# Altium PCB 电机参数系统测试.PcbDoc (part 1 of 2)
Units mil, origin at the board's own origin, x right, y up, seen from the top; angles counter-clockwise.
Board outline 5118.11 x 3258.06 mil, 2 copper layers (Top Layer, Bottom Layer); 172 components, 153 nets, 639 pads, 287 vias.
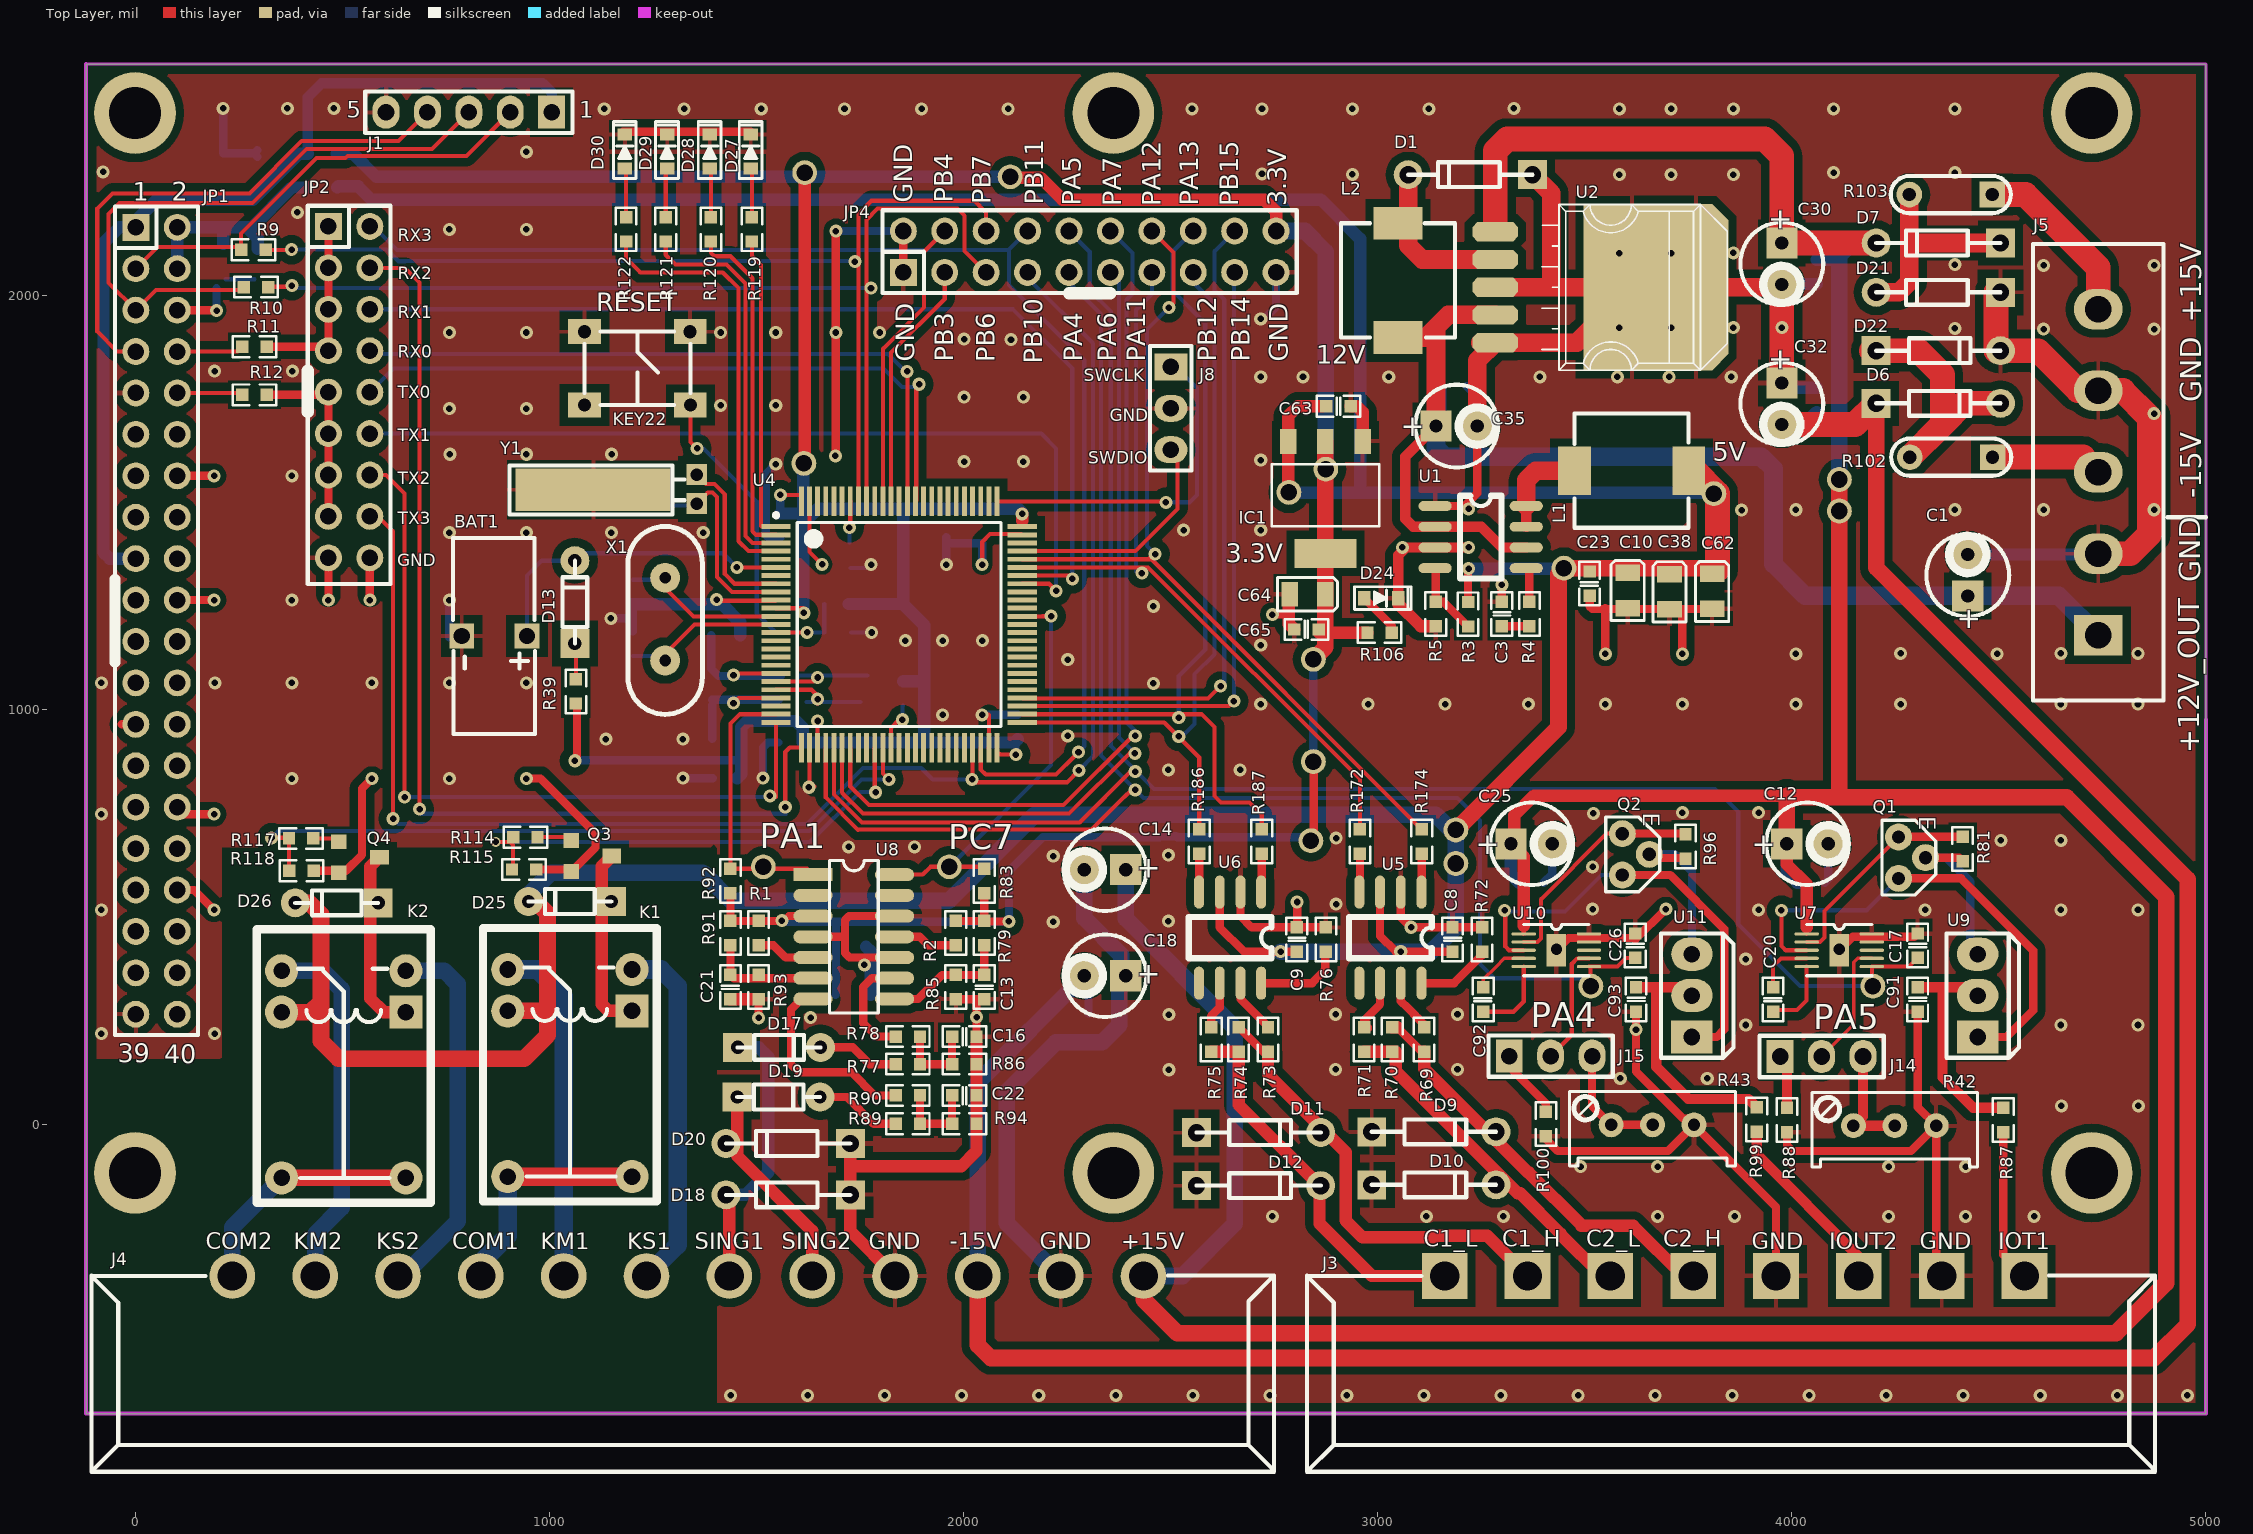
[diagram p0: Top Layer view]
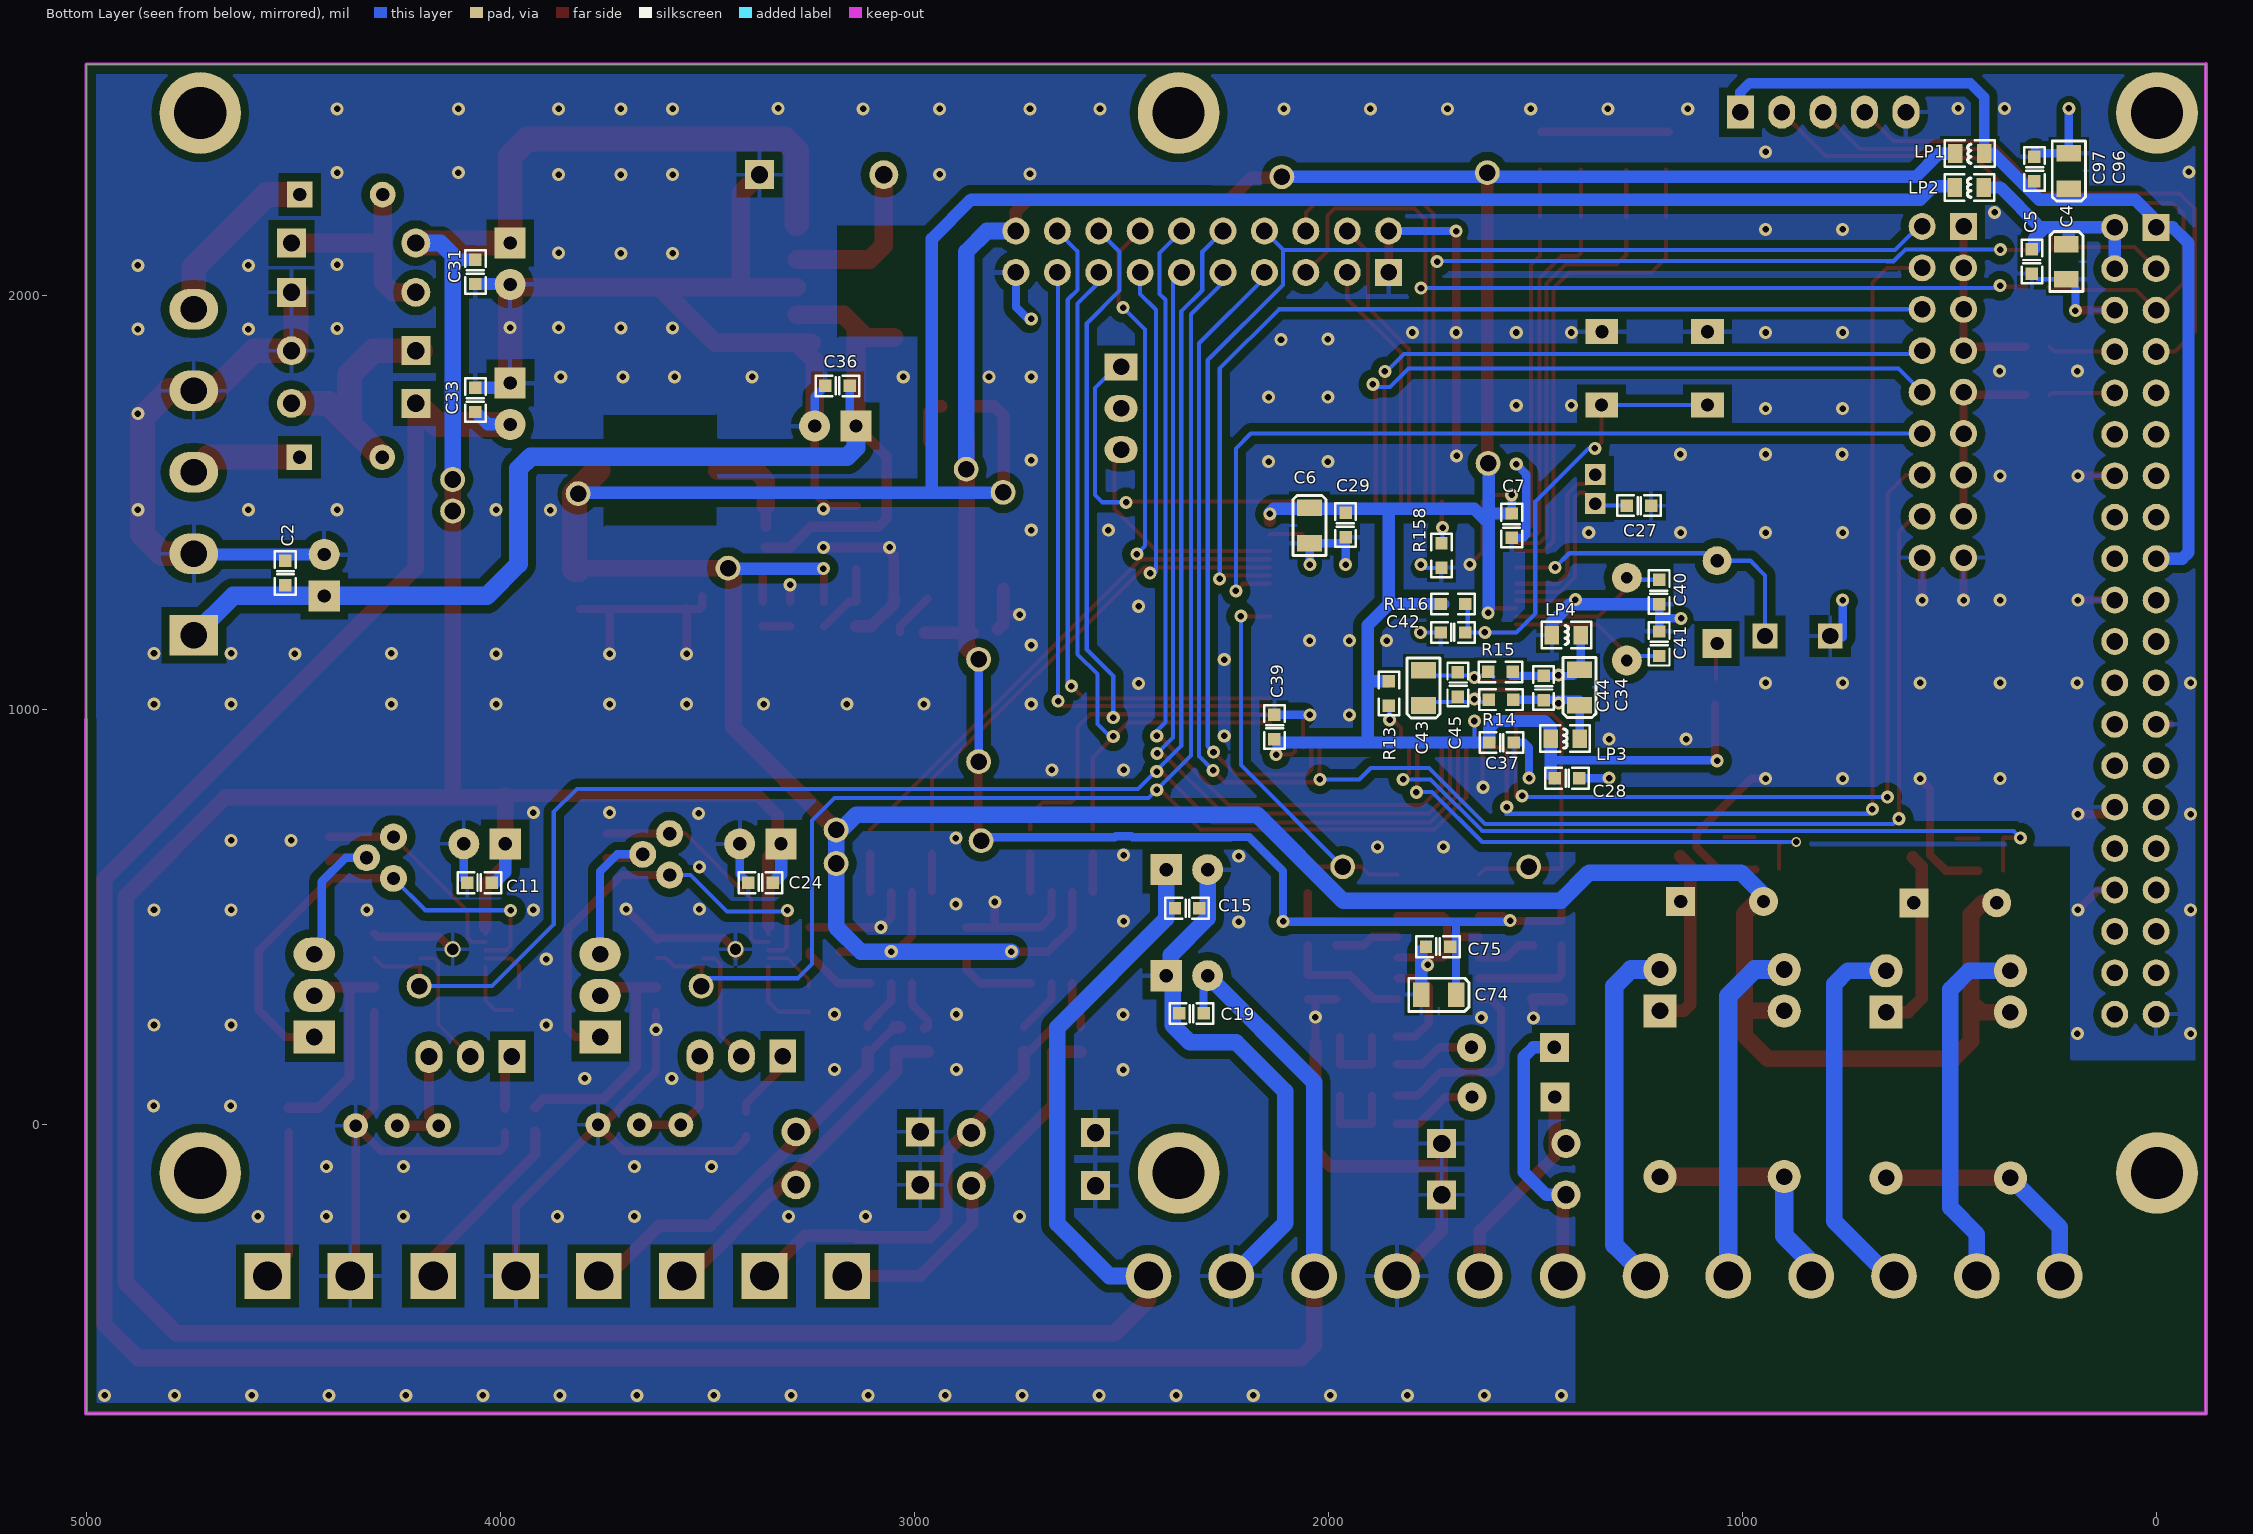
[diagram p1: Bottom Layer view, seen from below]

## Layer stack, top to bottom
Top Layer: signal copper 1.4
Dielectric: core 12.6, FR-4, Dk 4.8
Bottom Layer: signal copper 1.4

## Board outline
-118.11,2559.06 -118.11,-699 5000,-699 5000,2559.06

## Design rules (kind name [scope] priority, off if disabled: settings)
Clearance [All] p1: gap=7
HoleSize [All] p1 off: absolutevalues=TRUE maxlimit=100 minlimit=1 maxpercent=80.000 minpercent=20.000
HoleToHoleClearance [All] p1 off: gap=10 allowstackedmicrovias=TRUE
LayerPairs [All] p1 off: enforce=TRUE
MinimumSolderMaskSliver [All] p1 off: minsoldermaskwidth=10
PolygonConnect PolygonConnect_1 [(InPadClass('All Pads'))] p1: connectstyle=Relief reliefconductorwidth=10 reliefentries=4 polygonreliefangle="90 Angle"
PolygonConnect [All] p2: connectstyle=Direct reliefconductorwidth=10 reliefentries=4 polygonreliefangle="90 Angle"
RoutingVias [All] p1: holewidth=15 width=30 viastyle="Through Hole" minholewidth=10 minwidth=20 maxholewidth=28 maxwidth=50
SilkToSilkClearance [All] p1 off: silktosilkclearance=10
SilkscreenOverComponentPads [All] p1 off: minsilkscreentomaskgap=10
SolderMaskExpansion [All] p1: expansion=4
Width [All] p1: maxlimit=100 minlimit=7 preferedwidth=10
22 further rules are at their usual default settings.

## Classes and differential pairs
component class STM32: BAT1 C4 C5 C6 C7 C27 C28 C29 C34 C37 C39 C40 C41 C42 C43 C44 C45 C96 C97 D13 D27 D28 D29 D30 J1 J2 J8 JP1 JP2 JP3 JP4 KEY22 LP1 LP2 LP3 LP4 R9 R10 R11 R12 R13 R14 R15 R39 R116 R119 R120 R121 R122 R158 U4 X1 Y1
component class "U_motor sign": C8 C9 C11 C12 C13 C14 C15 C16 C17 C18 C19 C20 C21 C22 C24 C25 C26 C74 C75 C91 C92 C93 D9 D10 D11 D12 D17 D18 D19 D20 D25 D26 J3 J4 J14 J15 K1 K2 Q1 Q2 Q3 Q4 R1 R2 R42 R43 R69 R70 R71 R72 R73 R74 R75 R76 R77 R78 R79 R81 R83 R85 R86 R87 R88 R89 R90 R91 R92 R93 R94 R96 R99 R100 R114 R115 R117 R118 R172 R174 R186 R187 U5 U6 U7 U8 U9 U10 U11
component class U_POWER: C1 C2 C3 C10 C23 C30 C31 C32 C33 C35 C36 C38 C62 C63 C64 C65 C105 C106 D1 D6 D7 D21 D22 D24 IC1 J5 L1 L2 R3 R4 R5 R102 R103 R106 U1 U2

## Components (designator, comment, footprint, x,y, rotation, side; value= is the part's Value field where it differs from the comment)
BAT1 "超级电容（NC）" cjdr 852,1169 r180 top
C1 "47uF/35V" RB1 4425,1275 r90 top
C2 "104" C0603 4521,1329 r180 bottom
C3 "102" C0603 3298,1229.76 r0 top
C4 "10UF/6.3V" CA0805#1 220,2083 r90 bottom
C5 "104" C0603 300,2084 r0 bottom
C6 "10UF/6.3V" CA0805#1 2047,1446 r90 bottom
C7 "104" C0603 1556,1446 r0 bottom
C8 "104" C0603 3179,444 r0 top
C9 "104" C0603 2803,444 r0 top
C10 "10UF/6.3V" ca0805#1 3603,1289 r90 top
C11 "104" C0603 4049,580.5 r90 bottom
C12 "47UF/35V" RB1 3988,676.5 r0 top
C13 "104" C0603 2052.56,332 r180 top
C14 "47UF/35V" RB1 2392,614 r180 top
C15 "104" C0603 2343,523 r270 bottom
C16 "104(NC)" C0603 2000.76,213 r270 top
C17 "104" C0603 4302,429 r0 top
C18 "47UF/35V" RB1 2392,358 r180 top
C19 "104" C0603 2333,269 r270 bottom
C20 "102" C0603 3957,302 r180 top
C21 "104" C0603 1439.56,332 r180 top
C22 "104(NC)" C0603 2000.76,71 r270 top
C23 "104" C0603 3514,1306 r180 top
C24 "104" C0603 3370,580.5 r90 bottom
C25 "47UF/35V" RB1 3322,676.5 r0 top
C26 "104" C0603 3620,429 r0 top
C27 "5P" C0603 1252,1495 r270 bottom
C28 "104" C0603 1426,837 r270 bottom
C29 "104" C0603 1957,1448 r0 bottom
C30 "47UF/35V" RB1 3976,2127 r270 top
C31 "104" C0603 4058,2059 r0 bottom
C32 "47UF/35V" RB1 3976,1789 r270 top
C33 "104" C0603 4058,1750 r0 bottom
C34 "10UF/6.3V" CA0805#1 1393,1053 r270 bottom
C35 "47uF/35V" RB1 3141,1685 r0 top
C36 "104" C0603 3184,1780 r90 bottom
C37 "104" C0603 1584,923 r270 bottom
C38 "10UF/6.3V" ca0805#1 3704,1286 r90 top
C39 "104" C0603 2133,957 r180 bottom
C40 "22pf" C0603 1200,1286 r0 bottom
C41 "22pf" C0603 1204,1158 r180 bottom
C42 "104" C0603 1698.24,1184.69 r90 bottom
C43 "10UF/6.3V" CA0805#2 1779,1061 r270 bottom
C44 "104" C0603 1483,1051 r180 bottom
C45 "104" C0603 1690,1060 r180 bottom
C62 "10UF/6.3V" ca0805#2 3816,1278 r90 top
C63 "104" C0603 2904,1735 r270 top
C64 "10UF/6.3V" ca0805#2 2823,1271 r0 top
C65 "104" C0603 2830,1192 r90 top
C74 "10UF/6.3V" ca0805#2 1742,304 r180 bottom
C75 "104" C0603 1734,426 r90 bottom
C91 "103" C0603 4302,299 r0 top
C92 "102" C0603 3257,302 r180 top
C93 "103" C0603 3622,299 r0 top
C96 "10UF/6.3V" ca0805#1 212,2300 r270 bottom
C97 "104" C0603 298,2304 r180 bottom
D1 "1N5819" DIODE3 3374,2292 r180 top
D6 "1N4007" DIODE3 4204,1740 r0 top
D7 "1N4007" DIODE3 4504,2127 r180 top
D9 "P6KE6.8A" DIODE3 2986,-18.82 r0 top
D10 "P6KE6.8A" DIODE3 2986,-146.82 r0 top
D11 "P6KE6.8A" DIODE3 2562.82,-20.82 r0 top
D12 "P6KE6.8A" DIODE3 2562.82,-148.82 r0 top
D13 "1N4148" DIODE2 1062,1160 r90 top
D17 "1N4148" DIODE2 1455,185 r0 top
D18 "双向TVS 18V" DIODE3 1727,-171 r180 top
D19 "1N4148" DIODE2 1454,65 r0 top
D20 "双向TVS 18V" DIODE3 1727,-47 r180 top
D21 "P6KE18A" DIODE3 4504,2008 r180 top
D22 "P6KE18A" DIODE3 4204,1867 r0 top
D24 "LED" LED0603 3002,1272 r90 top
D25 "1N4148" diode2 1150,537 r180 top
D26 "1N4148" diode2 587,534 r180 top
D27 "LED" LED0603 1484,2341 r180 top
D28 "LED" LED0603 1385,2341 r180 top
D29 "LED" LED0603 1282,2341 r180 top
D30 "LED" LED0603 1180,2341 r180 top
IC1 "LM1117-3.3v" SOT-223 2873,1510 r0 top
J1 "CON5" SIP5 1006,2443 r180 top
J3 "CON8" WAIJIE*8 4877,-367 r180 top
J4 "CON12" WAIJIE*12 1531,-390 r0 top
J5 "CON5" power5.5 4740,1180 r90 top
J8 "SWD" sip3 2501,1828 r270 top
J14 "CON3" sip3 3972,163 r0 top
J15 "CON3" sip3 3318,164 r0 top
JP1 "HEADER 20X2" CON40 2,2165 r0 top
JP2 "HEADER 9X2" CON18 467,2168 r0 top
JP4 "HEADER 10X2" CON20 1855,2056 r90 top
K1 "5V继电器" RELAY2_HLS6 1058,188 r180 top
K2 "5V继电器" RELAY2_HLS6 512,185 r180 top
KEY22 "轻触开关" key0.2' 1201,1823 r0 top
L1 "4.7uH" "PWR_INDUTOR 7X7" 3751,1715 r180 top
L2 "100uH" "PWR_INDUTOR 7X7" 3187,1899 r90 top
LP1 "10uH" l0603 453,2343.23 r0 bottom
LP2 "10uH" l0603 454,2261.23 r0 bottom
LP3 "10uH" l0603 1428,930 r180 bottom
LP4 "10uH" l0603 1425,1180 r180 bottom
Q1 "9012" 9013 4258,693 r270 top
Q2 "9012" 9013 3591,701 r270 top
Q3 "9013" SOG3-2.5 1110,650 r270 top
Q4 "9013" SOG3-2.5 549,647 r270 top
R1 "5.1K" R0603 1510,461 r270 top
R2 "5.1K" R0603 1986,461 r270 top
R3 "52.3K" R0603 3223,1231 r270 top
R4 "20K" R0603 3371,1231.51 r270 top
R5 "10K" R0603 3136,1231 r90 top
R9 "33R" R0603 285.49,2115 r0 top
R10 "33R" R0603 291.49,2025 r0 top
R11 "33R" R0603 289,1872 r180 top
R12 "33R" R0603 289,1756 r180 top
R13 "10K" R0603 1850,1040 r270 bottom
R14 "10R" R0603 1584,1029 r180 bottom
R15 "10R" R0603 1585,1096 r180 bottom
R39 "3.3K" r0603 1069,1045 r270 top
R42 "5K" POT1 4429,-64 r180 top
R43 "5K" POT1 3844,-62 r180 top
R69 "10R" R0603 3108,204 r90 top
R70 "120R" R0603 3040,204 r270 top
R71 "10R" R0603 2963,204 r90 top
R72 "22K" R0603 3248,445.24 r90 top
R73 "10R" R0603 2731,204 r90 top
R74 "120R" R0603 2669,204.51 r270 top
R75 "10R" R0603 2594,204 r90 top
R76 "22K" R0603 2871,445.24 r90 top
R77 "5.1K" R0603 1865.49,149 r0 top
R78 "1K" R0603 1866,206.56 r180 top
R79 "5.1K" R0603 2055,461 r270 top
R81 "15R" R0603 4417,664 r270 top
R83 "1.5K" R0603 2055,587 r270 top
R85 "1K" R0603 1986,330.76 r270 top
R86 "1K" R0603 2002,149 r0 top
R87 "15R" R0603 4515,10 r270 top
R88 "1.5K" R0603 3993,10 r270 top
R89 "5.1K" R0603 1865.49,5 r0 top
R90 "1K" R0603 1866,64.56 r180 top
R91 "5.1K" R0603 1442,461 r270 top
R92 "1.5K" R0603 1442,587 r270 top
R93 "1K" R0603 1510,330.76 r270 top
R94 "1K" R0603 2002,5 r0 top
R96 "15R" R0603 3748,670 r270 top
R99 "15R" R0603 3920,11 r270 top
R100 "1.5K" R0603 3411,0 r270 top
R102 "XF030" RAD2 4485,1610 r180 top
R103 "XF030" RAD2 4484,2244 r180 top
R106 "1k" R0603 3005,1191 r0 top
R114 "1K" r0603 942,697 r0 top
R115 "3.3K" r0603 940,610 r180 top
R116 "4.7K" R0603 1700,1260 r180 bottom
R117 "1K" r0603 401,694 r0 top
R118 "3.3K" r0603 402,607 r180 top
R119 "1K" r0603 1485.12,2160 r90 top
R120 "1K" r0603 1386.12,2160 r90 top
R121 "1K" r0603 1277,2160 r90 top
R122 "1K" r0603 1181.12,2160 r90 top
R158 "10K" R0603 1732,1372 r90 bottom
R172 "33R" R0603 2953,681.49 r90 top
R174 "33R" R0603 3111,682 r270 top
R186 "33R" R0603 2574,682 r270 top
R187 "33R" R0603 2725,682 r270 top
U1 "AOZ1016" SO-8 3139,1492 r0 top
U2 "LM2576_12V" 2576_TP 3554,1978 r270 top
U4 "STM32F103VCT6" TQFP100 1811,1261 r0 top
U5 "PCA82C251T" SO-8 3106,560 r270 top
U6 "PCA82C251T" SO-8 2719,560 r270 top
U7 "XTR111" S-PDSO-G10 4036,458.94 r0 top
U8 "LM339D" SO14 1637,602 r270 top
U9 "IRF9540" 78XX 4446,207 r90 top
U10 "XTR111" S-PDSO-G10 3353,458.94 r0 top
U11 "IRF9540" 78XX 3756,207 r90 top
X1 "8MHz" XTAL1 1280,1319 r270 top
Y1 "32.768KHz" xtal4 1357,1556 r90 top

## Footprints (in the part's own frame and the unit in brackets; to place one, negate y for a bottom-side part, rotate by r counter-clockwise, add the part's x,y. Pads: shape width x height; smd on the part's side, far side on the other; paste and mask are expansions set on the pad)
78XX [mil]
  rect 80x100 hole 40: 1(3,-3)
  oval 80x100 hole 40: 2(103,-3) 3(203,-3)
  silkscreen extent -47,-103 253,72
2576_TP [mm]
  oct 10.2x4 smd: 0(-1.082,5.448)
  rect 10.2x6 smd: 0(-1.082,1.548)
  oct 1.18x2.8 smd: 1(-4.476,-6.855) 2(-2.776,-6.855) 3(-1.076,-6.855) 4(0.624,-6.855) 5(2.324,-6.855)
  silkscreen extent -6.15,-3.98 4.01,7.37
9013 [mil]
  round 65 hole 32: 1(0,0) 2(50,65) 3(100,0)
  silkscreen extent -40,-40 140,90
C0603 [mil]
  rect 30x30 smd: 1(2,-28) 2(2,31)
  silkscreen extent -23,-51 27,54
CA0805#1 [mil]
  rect 40x60 smd mask+3: 1(41.5,-1) 2(-43.5,-1)
  Top Layer pour cut-out: 18,29 18,-31 -20,-31 -20,29 18,29
  silkscreen extent -74,-41 72,39
CA0805#2 [mil]
  rect 40x60 smd mask+3: 1(50.5,8) 2(-34.5,8)
  Top Layer pour cut-out: 27,38 27,-22 -11,-22 -11,38 27,38
  silkscreen extent -64,-32 80,48
ca0805#1 [mil]
  rect 40x60 smd mask+3: 1(41.5,-1) 2(-43.5,-1)
  Top Layer pour cut-out: 18,29 18,-31 -20,-31 -20,29 18,29
  silkscreen extent -74,-41 72,39
ca0805#2 [mil]
  rect 40x60 smd mask+3: 1(50.5,8) 2(-34.5,8)
  Top Layer pour cut-out: 27,38 27,-22 -11,-22 -11,38 27,38
  silkscreen extent -64,-32 80,48
cjdr [mil]
  rect 60x60 hole 39.37: 1(-94.32,-9.22) 2(63.17,-9.22)
  silkscreen extent -114,-246 84,227
CON18 [mil]
  rect 65x65 hole 40: 1(0,-1)
  round 65 hole 40: 2(100,-1) 3(0,-101) 4(100,-101) 5(0,-201) 6(100,-201) 7(0,-301) 8(100,-301) 9(0,-401) 10(100,-401) 11(0,-501) 12(100,-501) 13(0,-601) 14(100,-601) 15(0,-701) 16(100,-701) 17(0,-801) 18(100,-801)
  silkscreen extent -50,-864 150,49
CON20 [mil]
  rect 65x65 hole 40: 1(0,0)
  round 65 hole 40: 2(100,0) 3(0,-100) 4(100,-100) 5(0,-200) 6(100,-200) 7(0,-300) 8(100,-300) 9(0,-400) 10(100,-400) 11(0,-500) 12(100,-500) 13(0,-600) 14(100,-600) 15(0,-700) 16(100,-700) 17(0,-800) 18(100,-800) 19(0,-900) 20(100,-900)
  silkscreen extent -50,-950 150,50
CON40 [mil]
  rect 65x65 hole 40: 1(0,0)
  round 65 hole 40: 2(100,0) 3(0,-100) 4(100,-100) 5(0,-200) 6(100,-200) 7(0,-300) 8(100,-300) 9(0,-400) 10(100,-400) 11(0,-500) 12(100,-500) 13(0,-600) 14(100,-600) 15(0,-700) 16(100,-700) 17(0,-800) 18(100,-800) 19(0,-900) 20(100,-900) 21(0,-1000) 22(100,-1000) 23(0,-1100) 24(100,-1100) 25(0,-1200) 26(100,-1200) 27(0,-1300) 28(100,-1300) 29(0,-1400) 30(100,-1400) 31(0,-1500) 32(100,-1500) 33(0,-1600) 34(100,-1600) 35(0,-1700) 36(100,-1700) 37(0,-1800) 38(100,-1800) 39(0,-1900) 40(100,-1900)
  silkscreen extent -50,-1950 150,50
DIODE2 [mil]
  rect 70x70 hole 32: 1(0,0)
  round 70 hole 32: 2(200,0)
  silkscreen extent 0,-30 200,30
diode2 [mil]
  rect 70x70 hole 32: 1(0,0)
  round 70 hole 32: 2(200,0)
  silkscreen extent 0,-30 200,30
DIODE3 [mil]
  rect 70x70 hole 42: 1(0,0)
  round 70 hole 42: 2(300,0)
  silkscreen extent 0,-30 300,30
key0.2' [mil]
  rect 78.74x60 hole 32: 1(-115.87,90.06) 1(139.13,90.06) 2(-115.87,-87.11) 2(140.04,-87.11)
  silkscreen extent -116,-87 140,90
l0603 [mil]
  rect 35x45 smd mask+3: 1(-36,0.23) 2(34,0.23)
  Top Layer pour cut-out: -16,20.23 14,20.23 14,-19.77 -16,-19.77 -16,20.23
  silkscreen extent -61,-32 59,32
LED0603 [mil]
  rect 35x30 smd: 1(-3,34) 2(-3,-48)
  silkscreen extent -30,-79 25,58
POT1 [mil]
  round 60 hole 30: 1(80,-60) 2(280,-60) 3(180,-60)
  silkscreen extent -20,-140 380,40
power5.5 [mm]
  rect 2.5x3 hole 1.62: 1(0,0)
  oval 2.5x3 hole 1.62: 2(5,0) 3(10,0) 4(15,0) 5(20,0)
  silkscreen extent -4,-4 24,4
"PWR_INDUTOR 7X7" [mm]
  rect 2x3 smd: 1(7,3.5) 2(0,3.5)
  silkscreen extent 0,0 7,7
R0603 [mil]
  rect 30x30 smd: 1(29.76,-4.44) 2(-29.24,-4.44)
  silkscreen extent -52,-29 53,21
r0603 [mil]
  rect 30x30 smd: 1(29.76,-4.44) 2(-29.24,-4.44)
  silkscreen extent -52,-29 53,21
RAD2 [mil]
  rect 62x62 hole 32: 1(0,0)
  round 62 hole 32: 2(200,0)
  silkscreen extent -45,-45 245,45
RB1 [mil]
  rect 75x75 hole 32: 1(0,0)
  round 75 hole 32: 2(100,0)
  silkscreen extent -50,-100 150,100
RELAY2_HLS6 [mil]
  round 80 hole 40: 1(-142,315) 1(158,315) 2(-142,-185) 3(158,-185) 5(158,-85)
  rect 80x80 hole 40: 4(-142,-85)
  silkscreen extent -202,-285 218,375
S-PDSO-G10 [mm]
  rect 1.2x2 smd: 0(2,-1)
  round 1 hole 0.7: 0(2.007,-0.94)
  oval 1.5x0.2 smd: 1(0,0) 2(0,-0.5) 3(0,-1) 4(0,-1.5) 5(0,-2) 6(4,-2) 7(4,-1.5) 8(4,-1) 9(4,-0.5) 10(4,0)
  silkscreen extent 0,-2.57 4,0.58
sip3 [mil]
  rect 65x80 hole 40: 1(0,0)
  oval 65x80 hole 40: 2(100,0) 3(200,0)
  silkscreen extent -50,-50 250,50
SIP5 [mil]
  rect 65x80 hole 40: 1(0,0)
  oval 65x80 hole 40: 2(100,0) 3(200,0) 4(300,0) 5(400,0)
  silkscreen extent -50,-50 450,50
SO14 [mm]
  rect 0.8x2.4 smd: 1(0,0)
  oval 0.8x2.4 smd: 2(1.27,0) 3(2.54,0) 4(3.81,0) 5(5.08,0) 6(6.35,0) 7(7.62,0) 8(7.62,5) 9(6.35,5) 10(5.08,5) 11(3.81,5) 12(2.54,5) 13(1.27,5) 14(0,5)
  silkscreen extent -0.86,1.01 8.48,3.99
SO-8 [mil]
  oval 80x24 smd: 1(0,0) 2(0,-50) 3(0,-100) 4(0,-150) 5(220,-150) 6(220,-100) 7(220,-50) 8(220,0)
  silkscreen extent 60,-175 160,25
SOG3-2.5 [mm]
  rect 0.9x0.95 smd: 1(1.026,-1.453) 2(-0.874,-1.453)
  rect 0.9x1.15 smd: 3(0.076,1.047)
SOT-223 [mil]
  rect 40x60 smd: 1(91,138) 2(1,138) 3(-89,138)
  rect 150x70 smd: 4(1,-132)
  silkscreen extent -129,-67 131,83
TQFP100 [mm]
  rect 1.8x0.3 smd: 1(-6.686,4.603) 2(-6.686,4.103) 3(-6.686,3.603) 4(-6.686,3.103) 5(-6.686,2.603) 6(-6.686,2.103) 7(-6.686,1.603) 8(-6.686,1.103) 9(-6.686,0.603) 10(-6.686,0.103) 11(-6.686,-0.397) 12(-6.686,-0.897) 13(-6.686,-1.397) 14(-6.686,-1.897) 15(-6.686,-2.397) 16(-6.686,-2.897) 17(-6.686,-3.397) 18(-6.686,-3.897) 19(-6.686,-4.397) 20(-6.686,-4.897) 21(-6.686,-5.397) 22(-6.686,-5.897) 23(-6.686,-6.397) 24(-6.686,-6.897) 25(-6.686,-7.397) 51(8.414,-7.397) 52(8.414,-6.897) 53(8.414,-6.397) 54(8.414,-5.897) 55(8.414,-5.397) 56(8.414,-4.897) 57(8.414,-4.397) 58(8.414,-3.897) 59(8.414,-3.397) 60(8.414,-2.897) 61(8.414,-2.397) 62(8.414,-1.897) 63(8.414,-1.397) 64(8.414,-0.897) 65(8.414,-0.397) 66(8.414,0.103) 67(8.414,0.603) 68(8.414,1.103) 69(8.414,1.603) 70(8.414,2.103) 71(8.414,2.603) 72(8.414,3.103) 73(8.414,3.603) 74(8.414,4.103) 75(8.414,4.603)
  rect 0.3x1.8 smd: 26(-5.136,-8.947) 27(-4.636,-8.947) 28(-4.136,-8.947) 29(-3.636,-8.947) 30(-3.136,-8.947) 31(-2.636,-8.947) 32(-2.136,-8.947) 33(-1.636,-8.947) 34(-1.136,-8.947) 35(-0.636,-8.947) 36(-0.136,-8.947) 37(0.364,-8.947) 38(0.864,-8.947) 39(1.364,-8.947) 40(1.864,-8.947) 41(2.364,-8.947) 42(2.864,-8.947) 43(3.364,-8.947) 44(3.864,-8.947) 45(4.364,-8.947) 46(4.864,-8.947) 47(5.364,-8.947) 48(5.864,-8.947) 49(6.364,-8.947) 50(6.864,-8.947) 76(6.864,6.153) 77(6.364,6.153) 78(5.864,6.153) 79(5.364,6.153) 80(4.864,6.153) 81(4.364,6.153) 82(3.864,6.153) 83(3.364,6.153) 84(2.864,6.153) 85(2.364,6.153) 86(1.864,6.153) 87(1.364,6.153) 88(0.864,6.153) 89(0.364,6.153) 90(-0.136,6.153) 91(-0.636,6.153) 92(-1.136,6.153) 93(-1.636,6.153) 94(-2.136,6.153) 95(-2.636,6.153) 96(-3.136,6.153) 97(-3.636,6.153) 98(-4.136,6.153) 99(-4.636,6.153) 100(-5.136,6.153)
  silkscreen extent -6.81,-7.65 7.11,5.43, body extent -6.14,-8.4 7.86,5.6, height 1.2
WAIJIE*8 [mm]
  rect 2.8x2.8 hole 1.8: 1(8,0) 2(13.08,0) 3(18.16,0) 4(23.24,0) 5(28.32,0) 6(33.4,0) 7(38.48,0) 8(43.56,0)
  silkscreen extent 0,-0.03 52,12
WAIJIE*12 [mm]
  round 2.8 hole 1.8: 1(22.963,0.584) 2(17.883,0.584) 3(12.803,0.584) 4(7.723,0.584) 5(2.643,0.584) 6(-2.437,0.584) 7(-7.517,0.584) 8(-12.597,0.584) 9(-17.677,0.584) 10(-22.757,0.584) 11(-27.837,0.584) 12(-32.917,0.584)
  silkscreen extent -41.55,-11.42 30.96,0.61
XTAL1 [mil]
  round 72 hole 28: 1(0,0) 2(200,0)
  silkscreen extent -124,-90 330,90
xtal4 [mil]
  rect 102.36x374.02 smd: 0(-25,250.91)
  rect 50x50 hole 30: 1(12,1) 2(-58,1)
  silkscreen extent -84,30 34,453

## Part data
BAT1: library part BAT
C1 C4 C6 C10 C12 C14 C18 C25 C30 C32 C34 C35 C38 C43 C62 C64 C74 C96: library part ELECTRO1, "Electrolytic Capacitor"
C2 C3 C15 C19 C23 C27 C31 C33 C36 C63 C65 C75 C97: library part CAP, "Capacitor"
C5 C7 C8 C9 C11 C13 C16 C17 C20 C21 C22 C24 C26 C28 C29 C37 C39 C40 C41 C42 C44 C45 C91 C92 C93: library part CAP, "Capacitance"
D1 D6 D7 D13 D17 D19 D25 D26: library part DIODE, "Diode"
D9 D10 D11 D12 D18 D20 D21 D22: library part "DIODE SCHOTTKY", "Schottky Diode"
IC1: library part 1117
J1 J3 J4 J5 J14 J15: "Connector"
J8: library part CON3, "Connector"
K1 K2: library part RELAY-SPDT
KEY22: library part SW-PB
L1 L2: library part INDUCTOR
LP1 LP2 LP3 LP4: library part L-MLCC, "Inductance"
Q1 Q2: library part PNP, "PNP Transistor"
Q3 Q4: library part NPN, "NPN Transistor"
R1 R2 R3 R4 R5 R9 R10 R11 R12 R13 R39 R69 R70 R71 R72 R73 R74 R75 R76 R77 R78 R79 R81 R83 R85 R86 R87 R88 R89 R90 R91 R92 R93 R94 R96 R99 R100 R106 R116 R158 R172 R174 R186 R187: library part RES2
R14 R15: library part RES, "Res"
R42 R43: library part "RESISTOR TAPPED"
R102 R103: library part RES4
R114 R115 R117 R118 R119 R120 R121 R122: library part R1
U2: library part LM2576
U8: "Quad Differential Comparator"
U9 U11: library part "MOSFET P"
X1: library part X'TAL
Y1: library part XTAL1

## Free pads (board coordinates)
  round 60 hole 40: 0(1617,2297) 0(4115,1556) 1(1615,1595) 1(4115,1480) 2(2786,1525) 2(2839,684) 2(2875,1581) 3(2845,875) 3(3812,1522) 4(2845,1122) 4(3450,1342) 5(3189,629) 5(3189,710) 6(4196,333) 7(3515,333) 8(1966,621) 9(1517,621) 10(2113,2287)
  round 196.85 hole 125.98: 3(0,-118.11) 3(0,2440.94) 3(2362.2,-118.11) 3(2362.2,2440.94) 4(4724.41,-118.11) 4(4724.41,2440.94)

## Via types
v1: diameter 31.5, hole 15.75, Top Layer to Bottom Layer, 286 vias
v2: diameter 23.62, hole 15.75, Top Layer to Bottom Layer, 1 vias

## Nets (pads, with @x,y where several pads share a name; then routed paths per layer and width w, separated by ;. In a path a pad name is that pad's centre, name@x,y a point inside that pad or via, vN(x,y) a via of type N, cw(c..) or ccw(c..) an arc to the next point about the centre after c; other vN are vias at no path point)
3V3: C96.1 C97.1 J1.1 JP1.1 JP1.17 LP1.1 | length 2219.3
  Bottom Layer w25: LP1.1@417,2343 417,2479 451,2513 984,2513 1006,2491 J1.1@1006,2443
  Bottom Layer w30: JP1.17@2,1365 -61,1365 -76,1380 -76,2116 -76,2127 -38,2165 JP1.1@2,2165 2,2181 52,2231 284,2231 396,2343 LP1.1@417,2343
3V3_IO: C6.1 C7.1 C28.1 C29.1 C37.1 C39.1 C64.1 C65.1 C74.1 C75.1 IC1.2 IC1.4 JP4.20 LP1.2 LP3.1 pad.0@1617,2297 pad.1@1615,1595 pad.2@2839,684 pad.2@2875,1581 pad.3@2845,875 pad.4@2845,1122 pad.10 R1.2 R2.2 R13.2 R39.1 R79.2 R83.1 R91.2 R92.1 R106.2 R116.2 U4.11 U4.28 U4.50 U4.75 U4.100 U8.3 | length 10345.4
  Top Layer w10: U4.11@1547.76,1245.37 v1@1613.37,1245.37 ; v1(1558,1519) U4.100@1604,1519 ; U4.28@1648.15,908.76 v1@1648.15,966.85 ; U4.50@2081.22,908.76 2081.22,899.78 2089,892 v1(2127,892)
  Top Layer w20: v1@1067,888 R39.1@1067,1012.8 ; R92.1@1437.56,557.24 R91.2@1437.56,490.24 R1.2@1505.56,490.24 v1@1562,490.24 ; 1579,502 U8.3@1637,502 ; R2.2@1981.56,490.24 R79.2@2050.56,490.24 ; R83.1@2050.56,557.24 R79.2@2050.56,490.24 ; v1(2110,489) 2051.8,489 R79.2@2050.56,490.24 ; pad.2@2846,693 pad.3@2846,858
  Top Layer w30: pad.1@1617,1595 pad.0@1617,2297 ; pad.10@2113,2287 2113,2285 2186,2285 2239,2232 2726,2232 2755,2203 JP4.20@2755,2156 ; 2142,1456 v1(2142,1473) ; C65.1@2859.56,1186.56 2874,1186.56 R106.2@2975.76,1186.56
  Top Layer w40: pad.4@2845,1122 2874,1151 2874,1186.56 IC1.4@2874,1378 IC1.2@2874,1648
  Bottom Layer w10: 1648,922 v1(1648,973) ; v1(2127,892) 2131,896 C39.1@2131,929
  Bottom Layer w20: v1@1070,878 1464,878 ; C7.1@1558,1474 v1(1558,1519) ; v1@1564.76,488.24 1691,488.24 ; C74.1@1691.5,312 1692.5,313 1692.5,486.74 1691,488.24 ; pad.3@2845,875 pad.4@2845,1126 ; pad.2@2846,692 2516.7,692 2513.95,694.75 2476.05,694.75 2473.3,692 2236.7,692 2235.95,692.75 2191.75,692.75 2110,611 v1(2110,489) 2109.24,488.24 1691,488.24
  Bottom Layer w30: LP1.2@487,2343 526,2343 582,2287 pad.10@2113,2287 ; C28.1@1454,835 1464,845 1464,878 LP3.1@1464,930.23 1464,958 1479,973 1596,973 1612,957 C37.1@1612,921 2123,921 C39.1@2131,929 ; C7.1@1558,1474 1611,1474 1613.37,1471.63 ; v1@1613.37,1245.37 1613.37,1450.37 ; pad.1@1615,1595 1613.37,1593.37 1613.37,1471.63 ; R116.2@1723.24,1255.56 R116.2@1729.24,1255.56 1854.44,1255.56 ; R13.2@1854.44,1069.24 1893.24,1069.24 ; 1854.44,1484.44 1854.44,1255.56 ; 1906,921 1906,1204 1854.44,1255.56 ; v1(2142,1473) 2142,1476 2133,1485 1648,1485 1624,1461 ; 1613.37,1450.37 1624,1461 ; 1613.37,1450.37 1613.37,1471.63 ; 1613.37,1471.63 1624,1461
  Bottom Layer w40: JP4.20@2755,2156 2825,2156 2875,2106 pad.2@2875,1581
  other v1: 1562,491 1062,877 1615,1234
+15V: C11.1 C12.1 C14.1 C15.1 C24.1 C25.1 C30.1 C31.1 D7.2 J4.1 pad.0@4115,1556 pad.1@4115,1480 U2.1 U7.1 U10.1 | length 10090
  Top Layer w10: U10.1@3353,458.94 3353,479 ; U7.1@4036,458.94 4036,475 4036,491.06
  Top Layer w30: C25.1@3330,668.5 3353,645.5 3353,479 ; C25.1@3330,676.5 3330,745 3378,793 3988,793 ; C12.1@3988,676.5 3988,627 4036,579 4036,475
  Top Layer w40: J4.1@2435.04,-367 2435.04,-424.04 2516,-505 4783,-505 4904,-384 4904,549 4664,789 3988,789 ; C12.1@3988,676.5 3988,793 ; 4115,809 pad.1@4115,1480 pad.0@4115,1548
  Top Layer w60: U2.1@3284,2174 3284,2349 3313,2378 3935,2378 3976,2337 C30.1@3976,2127 D7.2@4193,2127
  Bottom Layer w30: C25.1@3322,676.5 3322,602.5 C24.1@3342,582.5 ; C12.1@3988,676.5 3988,608 4013.5,582.5 C11.1@4021,582.5 ; C31.1@4060,2087 4104,2087
  Bottom Layer w40: C14.1@2392,614 2392,496 2655,233 2655,-241 2529,-367 J4.1@2435.04,-367 ; pad.0@4115,1548 pad.0@4115,1556 4115,2098 4144,2127 D7.2@4193,2127
-15V: C18.2 C19.2 C32.2 C33.2 D6.1 J4.3 | length 6927.9
  Top Layer w40: J4.3@2035.04,-367 2035.04,-534.04 2066,-565 4875,-565 4956,-484 4956,591 4204,1343 D6.1@4204,1740
  Top Layer w60: C32.2@3976,1689 4153,1689 D6.1@4204,1740
  Bottom Layer w20: C19.2@2302,267 C18.2@2302,348
  Bottom Layer w30: C32.2@3976,1689 4030,1689 C33.2@4060,1719
  Bottom Layer w40: J4.3@2035.04,-367 2035.04,101.04 C18.2@2292,358
BOOT0: R158.1 U4.94 | length 99.7
  Top Layer w10: v1(1725,1440) 1726.89,1441.89 U4.94@1726.89,1503.24
  Bottom Layer w10: R158.1@1725,1404.32 v1(1725,1440)
BOOT1: R13.1 U4.37 | length 118.2
  Top Layer w10: U4.37@1825.32,908.76 1825.32,956.31 1845,976 v1(1853,976)
  Bottom Layer w10: v1(1853,976) 1853,1008.8 R13.1@1854.44,1010.24
CAN1_H: D11.2 J3.7 R73.2 R74.2 | length 1082.2
  Top Layer w20: R74.2@2664.56,233.76 2723.56,174.76 R73.2@2735.44,174.76
  Top Layer w30: R73.2@2735.44,174.76 2735.44,119.56 D11.2@2869.32,-14.32 ; D11.2@2862.82,-20.82 2875.82,-20.82 2923,-68 2923,-233 2963.75,-273.75 3139.02,-273.75 3142.77,-270 3265.04,-270 J3.7@3362.04,-367
CAN1_L: D12.2 J3.8 R74.1 R75.2 | length 916.9
  Top Layer w30: R75.2@2598.44,174.76 R74.1@2664.56,174.76 2664.56,46.44 2859.82,-148.82 2859.82,-240.53 2986.29,-367 J3.8@3162.04,-367
CAN2_H: D9.2 J3.5 R69.2 R70.2 | length 1002.7
  Top Layer w20: R70.2@3047.76,233.24 R69.2@3112.44,168.56
  Top Layer w30: R70.2@3035.56,233.24 R70.2@3047.76,233.24 ; R69.2@3112.44,174.76 3112.44,168.56 3112.44,133.74 3363.09,-116.91 3364.8,-116.91 3492.18,-244.29 3492.18,-246 3617,-246 3738,-367 J3.5@3762.04,-367
CAN2_L: D10.2 J3.6 R70.1 R71.2 | length 847.7
  Top Layer w30: R71.2@2967.44,174.76 3043.56,174.76 3043.56,127.44 3337.91,-166.91 3344.09,-166.91 3442.18,-265 3442.18,-266.71 3542.47,-367 J3.6@3562.04,-367